# EAGLE board Task 5 (EAGLE 7.6.0)

Size 73.58 x 63.39 mm. Coordinates in mm from the lower left corner, seen from the top.
Outline: 0,0 56.82,0 56.82,53.33 0,53.33 0,0
Copper layers (1*16): Top 0.035mm / dielectric 1.5mm / Bottom 0.035mm
Design rules "default": minimum track width 10mil, minimum drill 24mil, track to track 8mil, track to pad 8mil, pad to pad 8mil, via to via 8mil, smd to smd 8mil, copper to edge 40mil, drill to drill 8mil, minimum pad ring 10mil, minimum via ring 8mil, stop-mask expansion 4mil, vias tented up to drill 0mil, thermal gap 10mil

## Footprints (pad centres in the part's own frame; a part is rotated, then mirrored left to right if it is on the bottom)
LED5MM = drill 0.813 octagon: A -1.27,0; K 1.27,0
PIEZO-22MM = drill 1 pad 2.54: P$1 -5,0; P$2 5,0
0207/10 = drill 0.813 octagon: 1 -5.08,0; 2 5.08,0
TL1105 = drill 1 pad 1.676: 1 -2.25,3.25; 2 2.25,3.25; 3 -2.25,-3.25; 4 2.25,-3.25
ARDUINO_UNO = drill 1.016 pad 1.88: 0 63.5,50.8; 1 60.96,50.8; 2 58.42,50.8; 3 55.88,50.8; 3.3V 35.56,2.54; 4 53.34,50.8; 5 50.8,50.8; 5V 38.1,2.54; 6 48.26,50.8; 7 45.72,50.8; 8 41.656,50.8; 9 39.116,50.8; 10 36.576,50.8; 11 34.036,50.8; 12 31.496,50.8; 13 28.956,50.8; A0 50.8,2.54; A1 53.34,2.54; A2 55.88,2.54; A3 58.42,2.54; A4 60.96,2.54; A5 63.5,2.54; AREF 23.876,50.8; GND 26.416,50.8; GND. 43.18,2.54; GND.. 40.64,2.54; I/OREF 30.48,2.54; N/C 27.94,2.54; RESET 33.02,2.54; SCL 18.796,50.8; SDA 21.336,50.8; VIN 45.72,2.54 | hole 3.2: 66.04,7.62; 66.04,35.56; 15.24,50.8; 13.97,2.54

## Placement (x,y rotation side)
D1  [LED5MM]  5,746.68 0 top  (outside the outline)
D2  [LED5MM]  5,759.38 0 top  (outside the outline)
PIEZO1  [PIEZO-22MM]  5,22.78 0 top
R1  2k‎Ω  [0207/10]  5,619.68 0 top  (outside the outline)
R2  470‎Ω  [0207/10]  5,733.98 0 top  (outside the outline)
R3  470‎Ω  [0207/10]  5,479.98 0 top  (outside the outline)
R4  470‎Ω  [0207/10]  5,492.68 0 top  (outside the outline)
R5  200‎Ω  [0207/10]  5,632.38 0 top  (outside the outline)
R6  400‎Ω  [0207/10]  5,645.08 0 top  (outside the outline)
R7  800‎Ω  [0207/10]  5,657.78 0 top  (outside the outline)
R8  1600‎Ω  [0207/10]  5,670.48 0 top  (outside the outline)
R9  12800‎Ω  [0207/10]  5,225.98 0 top  (outside the outline)
R10  6400‎Ω  [0207/10]  5,238.68 0 top  (outside the outline)
R11  3200‎Ω  [0207/10]  5,251.38 0 top  (outside the outline)
R12  1600‎Ω  [0207/10]  5,264.08 0 top  (outside the outline)
R13  800‎Ω  [0207/10]  5,276.78 0 top  (outside the outline)
R14  400‎Ω  [0207/10]  5,289.48 0 top  (outside the outline)
R15  200‎Ω  [0207/10]  5,302.18 0 top  (outside the outline)
R16  2k‎Ω  [0207/10]  5,314.88 0 top  (outside the outline)
R17  3200‎Ω  [0207/10]  5,683.18 0 top  (outside the outline)
R18  6400‎Ω  [0207/10]  5,695.88 0 top  (outside the outline)
R19  12800‎Ω  [0207/10]  5,708.58 0 top  (outside the outline)
R20  25600‎Ω  [0207/10]  5,721.28 0 top  (outside the outline)
R21  1k‎Ω  [0207/10]  5,772.08 0 top  (outside the outline)
R22  12800‎Ω  [0207/10]  5,327.58 0 top  (outside the outline)
R23  6400‎Ω  [0207/10]  5,340.28 0 top  (outside the outline)
R24  3200‎Ω  [0207/10]  5,352.98 0 top  (outside the outline)
R25  1600‎Ω  [0207/10]  5,365.68 0 top  (outside the outline)
R26  800‎Ω  [0207/10]  5,378.38 0 top  (outside the outline)
R27  400‎Ω  [0207/10]  5,391.08 0 top  (outside the outline)
R28  200‎Ω  [0207/10]  5,403.78 0 top  (outside the outline)
R29  2k‎Ω  [0207/10]  5,454.58 0 top  (outside the outline)
R30  1k‎Ω  [0207/10]  5,784.78 0 top  (outside the outline)
S1  [TL1105]  5,416.48 0 top  (outside the outline)
S2  [TL1105]  5,467.28 0 top  (outside the outline)
S3  [TL1105]  5,429.18 0 top  (outside the outline)
S4  [TL1105]  5,441.88 0 top  (outside the outline)
S5  [TL1105]  5,505.38 0 top  (outside the outline)
S6  [TL1105]  5,35.48 0 top
S7  [TL1105]  5,48.18 0 top
S8  [TL1105]  5,60.88 0 top
S9  [TL1105]  5,73.58 0 top  (outside the outline)
S10  [TL1105]  5,86.28 0 top  (outside the outline)
S11  [TL1105]  5,98.98 0 top  (outside the outline)
S12  [TL1105]  5,518.08 0 top  (outside the outline)
S13  [TL1105]  5,530.78 0 top  (outside the outline)
S14  [TL1105]  5,543.48 0 top  (outside the outline)
S15  [TL1105]  5,556.18 0 top  (outside the outline)
S16  [TL1105]  5,111.68 0 top  (outside the outline)
S17  [TL1105]  5,124.38 0 top  (outside the outline)
S18  [TL1105]  5,137.08 0 top  (outside the outline)
S19  [TL1105]  5,149.78 0 top  (outside the outline)
S20  [TL1105]  5,162.48 0 top  (outside the outline)
S21  [TL1105]  5,175.18 0 top  (outside the outline)
S22  [TL1105]  5,187.88 0 top  (outside the outline)
S23  [TL1105]  5,200.58 0 top  (outside the outline)
S24  [TL1105]  5,213.28 0 top  (outside the outline)
S25  [TL1105]  5,568.88 0 top  (outside the outline)
S26  [TL1105]  5,581.58 0 top  (outside the outline)
S27  [TL1105]  5,594.28 0 top  (outside the outline)
S28  [TL1105]  5,606.98 0 top  (outside the outline)
U1  [ARDUINO_UNO]  5,10.08 0 top

## Library data of the parts
D1 D2 PIEZO1 R1-R30 S1-S28 U1 = AUTODESK_CIRCUITS_BREADBOARD

## Nets
N$1: S11.1
N$2: R9.2 S11.3
N$3: S19.2
N$4: S19.1
N$5: R9.1 R10.2 S19.3
N$6: S18.2
N$7: S18.1
N$8: R10.1 R11.2 S18.3
N$9: S10.2
N$10: S10.1
N$11: R11.1 R12.2 S10.3
N$12: S9.2
N$13: S9.1
N$14: R12.1 R13.2 S9.3
N$15: S8.2
N$16: S8.1
N$17: R13.1 R14.2 S8.3
N$18: S7.2
N$19: S7.1
N$20: R14.1 R15.2 S7.3
N$21: R15.1 R16.2 S6.3 U1.A3
N$22: R28.1 R29.2 S4.3 U1.A4
N$23: S16.2
N$24: S16.1
N$25: R27.1 R28.2 S16.3
N$26: S17.2
N$27: S17.1
N$28: R26.1 R27.2 S17.3
N$29: S20.2
N$30: S20.1
N$31: R25.1 R26.2 S20.3
N$32: S21.2
N$33: S21.1
N$34: R24.1 R25.2 S21.3
N$35: S22.2
N$36: S22.1
N$37: R23.1 R24.2 S22.3
N$38: S23.2
N$39: S23.1
N$40: R22.1 R23.2 S23.3
N$41: S24.1
N$42: R22.2 S24.3
N$43: S6.2
N$44: S6.1
N$45: S4.1
N$46: S1.2
N$47: S4.2
N$48: R3.1 S2.1 U1.3
N$49: R2.1 S1.1 U1.4
N$50: S2.2
N$51: S2.3
N$52: S3.3
N$53: S1.3
N$54: PIEZO1.P$1 U1.8
N$55: S6.4 S7.4 S8.4 S9.4 S10.4 S11.4 S18.4 S19.4
N$56: S4.4 S16.4 S17.4 S20.4 S21.4 S22.4 S23.4 S24.4
N$57: S5.4 S12.4 S13.4 S14.4 S15.4 S25.4 S26.4 S27.4 S28.4
N$58: S5.2
N$59: S5.1
N$60: R1.2 R5.1 S5.3 U1.A5
N$61: S12.2
N$62: S12.1
N$63: R5.2 R6.1 S12.3
N$64: S13.2
N$65: S13.1
N$66: R6.2 R7.1 S13.3
N$67: S14.2
N$68: S14.1
N$69: R7.2 R8.1 S14.3
N$70: S15.2
N$71: S15.1
N$72: R8.2 R17.1 S15.3
N$73: S25.2
N$74: S25.1
N$75: R17.2 R18.1 S25.3
N$76: S26.2
N$77: S26.1
N$78: R18.2 R19.1 S26.3
N$79: S27.2
N$80: S27.1
N$81: R19.2 R20.1 S27.3
N$82: S28.1
N$83: R20.2 S28.3
N$84: R4.1 S3.1 U1.2
N$85: R1.1 R2.2 R3.2 R4.2 R16.1 R29.1 U1.5V
N$86: S3.2
N$87: PIEZO1.P$2 R21.1 R30.1 S1.4 S2.4 S3.4 S11.2 S24.2 S28.2 U1.GND..
N$88: D2.K R21.2
N$89: D1.K R30.2
N$90: D1.A U1.5
N$91: D2.A U1.6

## Tracks (layer width: path | path; a pad name or v marks a point on that pad's centre or on a via)
N$2  (1 unrouted)
N$5  (2 unrouted)
N$8  (2 unrouted)
N$11  (2 unrouted)
N$14  (2 unrouted)
N$17  (2 unrouted)
N$20  (2 unrouted)
N$21  (3 unrouted)
N$22  (3 unrouted)
N$25  (2 unrouted)
N$28  (2 unrouted)
N$31  (2 unrouted)
N$34  (2 unrouted)
N$37  (2 unrouted)
N$40  (2 unrouted)
N$42  (1 unrouted)
N$48  (2 unrouted)
N$49  (2 unrouted)
N$54  (1 unrouted)
N$55  (7 unrouted)
N$56  (7 unrouted)
N$57  (8 unrouted)
N$60  (3 unrouted)
N$63  (2 unrouted)
N$66  (2 unrouted)
N$69  (2 unrouted)
N$72  (2 unrouted)
N$75  (2 unrouted)
N$78  (2 unrouted)
N$81  (2 unrouted)
N$83  (1 unrouted)
N$84  (2 unrouted)
N$85  (6 unrouted)
N$87  (9 unrouted)
N$88  (1 unrouted)
N$89  (1 unrouted)
N$90  (1 unrouted)
N$91  (1 unrouted)